# EAGLE board servo-tester-a (EAGLE 4.16)
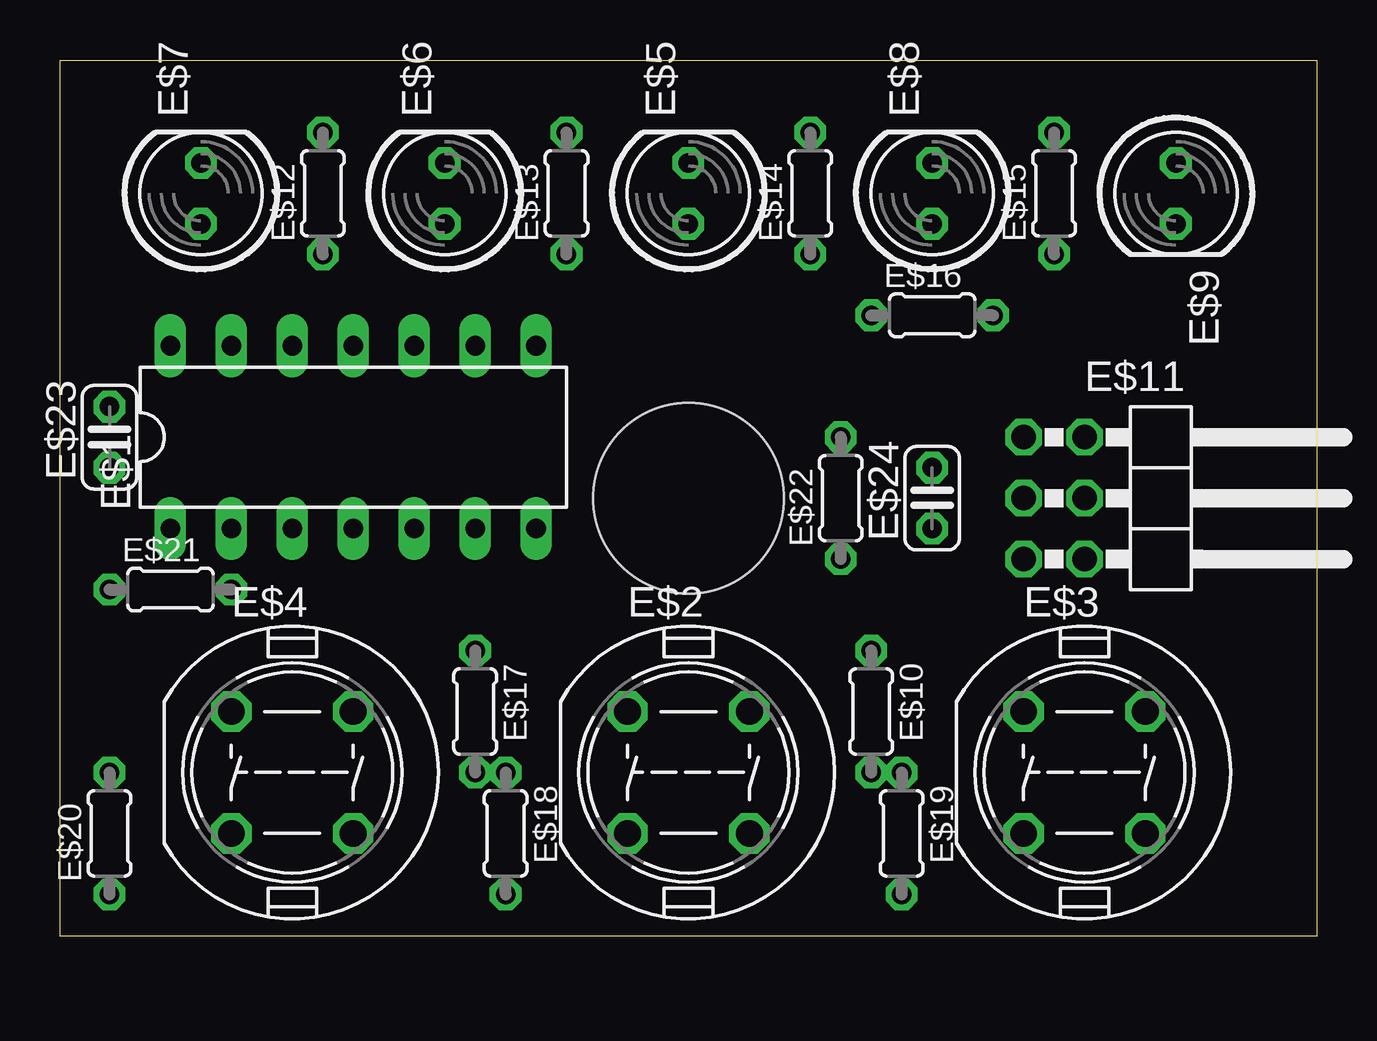
[diagram p0: board, top side]
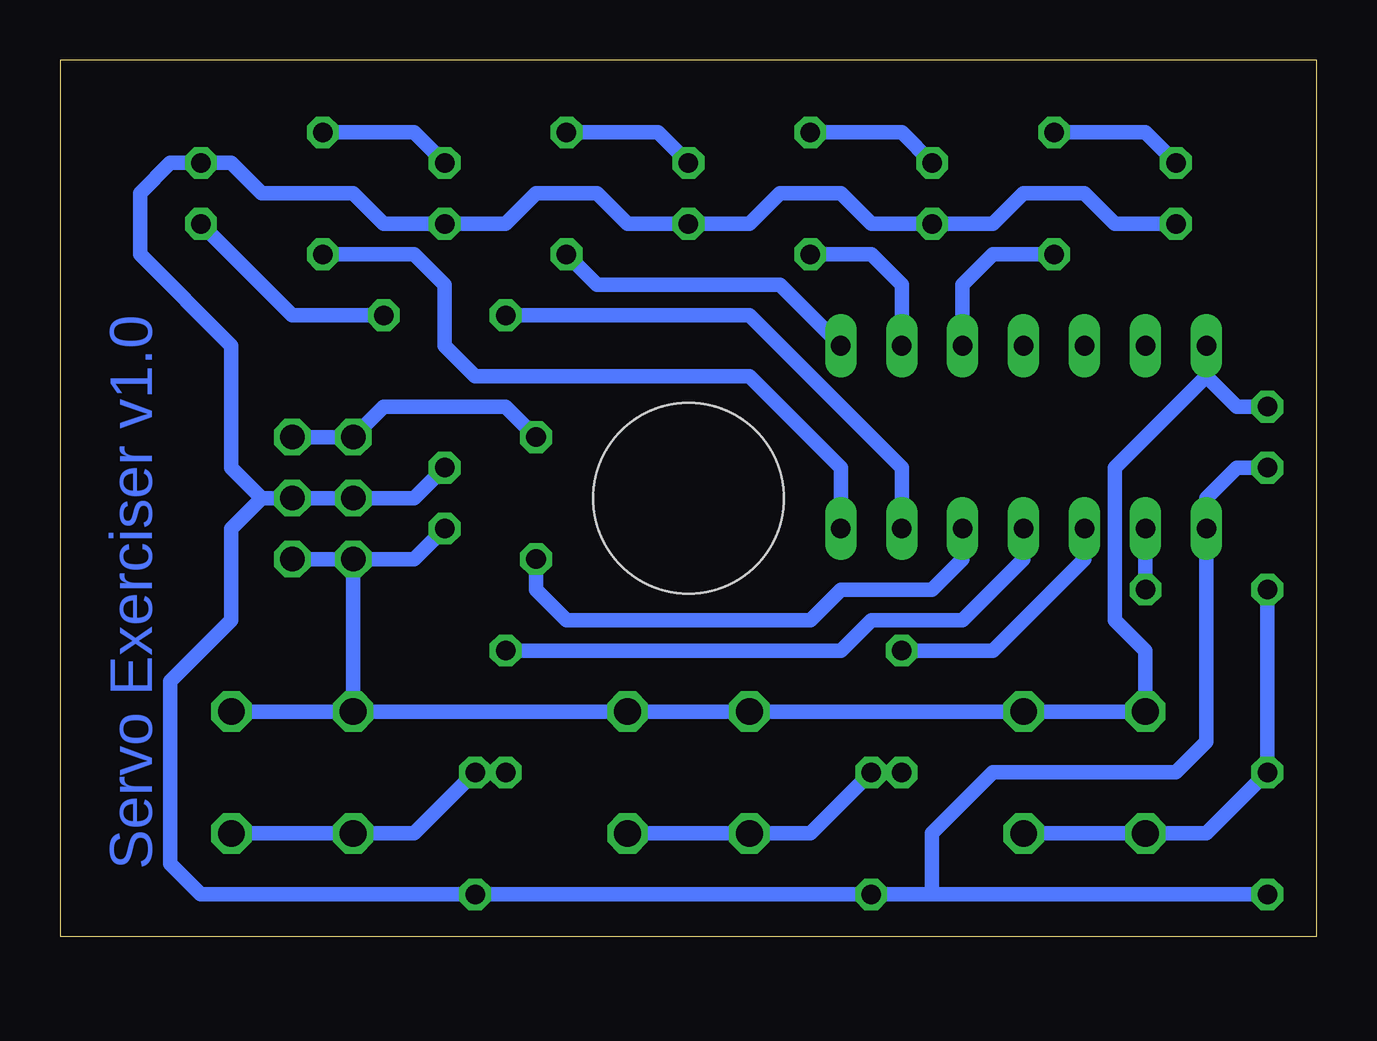
[diagram p1: board, bottom side, seen from below]

Size 52.39 x 36.51 mm. Coordinates in mm from the lower left corner, seen from the top.
Outline: 0,0 0,36.51 52.39,36.51 52.39,0 0,0
Copper layers (1*16): Top 0.035mm / dielectric 1.5mm / Bottom 0.035mm
Design rules "default": minimum track width 10mil, minimum drill 24mil, track to track 8mil, track to pad 8mil, pad to pad 8mil, via to via 8mil, smd to smd 8mil, copper to edge 40mil, drill to drill 8mil, minimum pad ring 10mil, minimum via ring 8mil, stop-mask expansion 4mil, vias tented up to drill 0mil, thermal gap 10mil
Holes 7.94 mm at 26.19,18.26

## Footprints (pad centres in the part's own frame; a part is rotated, then mirrored left to right if it is on the bottom)
DIL14 = drill 0.813 long: 1 -7.62,-3.81; 2 -5.08,-3.81; 3 -2.54,-3.81; 4 0,-3.81; 5 2.54,-3.81; 6 5.08,-3.81; 7 7.62,-3.81; 8 7.62,3.81; 9 5.08,3.81; 10 2.54,3.81; 11 0,3.81; 12 -2.54,3.81; 13 -5.08,3.81; 14 -7.62,3.81
DT6 = drill 1.118 octagon: 1 -2.54,2.54; 2 2.54,2.54; 3 2.54,-2.54; 4 -2.54,-2.54
LED5MM = drill 0.813 octagon: A -1.27,0; K 1.27,0
0204/5 = drill 0.813 octagon: 1 -2.54,0; 2 2.54,0
2X03/90 = drill 1.016 octagon: 1 -2.54,-6.35; 2 -2.54,-3.81; 3 0,-6.35; 4 0,-3.81; 5 2.54,-6.35; 6 2.54,-3.81
C025-024X044 = drill 0.813 octagon: 1 -1.27,0; 2 1.27,0

## Placement (x,y rotation side)
E$1  [DIL14]  12.22,20.8 0 top
E$2  [DT6]  26.19,6.83 0 top
E$3  [DT6]  42.7,6.83 0 top
E$4  [DT6]  9.68,6.83 0 top
E$5  [LED5MM]  26.19,30.96 90 top
E$6  [LED5MM]  16.03,30.96 90 top
E$7  [LED5MM]  5.87,30.96 90 top
E$8  [LED5MM]  36.35,30.96 90 top
E$9  [LED5MM]  46.51,30.96 270 top
E$10  [0204/5]  33.81,9.37 270 top
E$11  [2X03/90]  46.51,18.26 270 top
E$12  [0204/5]  10.95,30.96 90 top
E$13  [0204/5]  21.11,30.96 90 top
E$14  [0204/5]  31.27,30.96 90 top
E$15  [0204/5]  41.43,30.96 90 top
E$16  [0204/5]  36.35,25.88 0 top
E$17  [0204/5]  17.3,9.37 270 top
E$18  [0204/5]  18.57,4.29 270 top
E$19  [0204/5]  35.08,4.29 270 top
E$20  [0204/5]  2.06,4.29 90 top
E$21  [0204/5]  4.6,14.45 0 top
E$22  [0204/5]  32.54,18.26 90 top
E$23  [C025-024X044]  2.06,20.8 90 top
E$24  [C025-024X044]  36.35,18.26 90 top

## Library data of the parts
E$1 = 74xx-eu
E$2-E$4 = switch-misc
E$5-E$9 = led
E$10 E$17-E$24 = rcl
E$11 = pinhead
E$12-E$16 = ref-packages

## Nets
S$1: E$7.K E$12.2
S$2: E$6.K E$13.2
S$3: E$5.K E$14.2
S$4: E$8.K E$15.2
S$7: E$9.K E$16.2
S$8: E$2.3 E$2.4 E$17.2 E$18.1
S$9: E$3.3 E$3.4 E$10.2 E$19.1
S$10: E$23.1
S$11: E$4.3 E$4.4 E$20.2 E$21.1
S$12: E$1.1 E$5.A E$6.A E$7.A E$8.A E$9.A E$11.3 E$11.4 E$18.2 E$19.2 E$20.1 E$24.2
S$13: E$1.14 E$2.1 E$2.2 E$3.1 E$3.2 E$4.1 E$4.2 E$11.5 E$11.6 E$23.2 E$24.1
S$15: E$11.1 E$11.2 E$22.2
S$17: E$1.7 E$15.1
S$18: E$1.6 E$16.1
S$19: E$1.8 E$14.1
S$20: E$1.9 E$13.1
S$21: E$1.10 E$12.1
S$22: E$1.2 E$21.2
S$23: E$1.3 E$17.1
S$24: E$1.4 E$10.1
S$25: E$1.5 E$22.1

## Tracks (layer width: path | path; a pad name or v marks a point on that pad's centre or on a via)
S$1
  Bottom 0.61: E$12.2 7.14,33.5 E$7.K
S$2
  Bottom 0.61: E$13.2 17.3,33.5 E$6.K
S$3
  Bottom 0.61: E$14.2 27.46,33.5 E$5.K
S$4
  Bottom 0.61: E$15.2 37.62,33.5 E$8.K
S$5  (via drill 0.6)
  other vias: 26.19,18.26
S$7
  Bottom 0.61: E$16.2 42.7,25.88 E$9.K
S$8
  Bottom 0.61: E$17.2 E$18.1 21.11,4.29 E$2.4 E$2.3
S$9
  Bottom 0.61: E$10.2 E$19.1 37.62,4.29 E$3.4 E$3.3
S$10
  Bottom 0.61: 4.6,16.99 4.6,18.26 3.33,19.53 E$23.1
S$11
  Bottom 0.61: E$21.1 E$20.2 4.6,4.29 E$4.4 E$4.3
S$12
  Bottom 0.61: E$7.A 8.41,29.69 9.68,30.96 12.22,30.96 13.49,29.69 E$6.A 18.57,29.69 19.84,30.96 22.38,30.96 23.65,29.69 E$5.A 28.73,29.69 30,30.96 32.54,30.96 33.81,29.69 E$8.A 38.89,29.69 40.16,30.96 43.97,30.96 45.24,32.23 E$9.A 47.78,32.23 49.05,30.96 49.05,28.42 45.24,24.61 45.24,19.53 43.97,18.26 | E$1.1 4.6,8.1 5.87,6.83 13.49,6.83 16.03,4.29 16.03,1.75 | 16.03,1.75 E$18.2 E$19.2 46.51,1.75 47.78,3.02 47.78,10.64 45.24,13.18 45.24,16.99 43.97,18.26 | E$20.1 16.03,1.75 | 43.97,18.26 E$11.4 E$11.3 37.62,18.26 E$24.2
S$13
  Bottom 0.61: E$24.1 37.62,15.72 E$11.5 | E$11.5 E$11.6 | E$3.1 E$3.2 | E$3.1 E$11.5 | E$3.1 E$2.2 E$2.1 E$4.2 E$4.1 7.14,11.91 8.41,13.18 8.41,19.53 4.6,23.34 | 4.6,23.34 E$1.14 | E$23.2 3.33,22.07 4.6,23.34
S$15
  Bottom 0.61: E$22.2 33.81,22.07 38.89,22.07 E$11.1 E$11.2
S$17
  Bottom 0.61: E$15.1 37.62,28.42 36.35,27.15 36.35,24.61 35.08,23.34 23.65,23.34 19.84,19.53 E$1.7
S$18
  Bottom 0.61: E$16.1 23.65,25.88 17.3,19.53 E$1.6
S$19
  Bottom 0.61: E$1.8 22.38,27.15 30,27.15 E$14.1
S$20
  Bottom 0.61: E$13.1 18.57,28.42 17.3,27.15 E$1.9
S$21
  Bottom 0.61: E$1.10 14.76,27.15 13.49,28.42 E$12.1
S$22
  Bottom 0.61: E$21.2 E$1.2
S$23
  Bottom 0.61: E$1.3 9.68,15.72 13.49,11.91 E$17.1
S$24
  Bottom 0.61: E$1.4 12.22,15.72 14.76,13.18 18.57,13.18 19.84,11.91 E$10.1
S$25
  Bottom 0.61: E$22.1 32.54,14.45 31.27,13.18 21.11,13.18 19.84,14.45 16.03,14.45 14.76,15.72 E$1.5

## Text on the board
Bottom: Servo Exerciser v1.0